# Altium PCB PCB.PcbDoc
Units mil, origin at the board's own origin, x right, y up, seen from the top; angles counter-clockwise.
Board outline 6000 x 4000 mil, 2 copper layers (Top Layer, Bottom Layer); 44 components, 59 nets, 169 pads, 0 vias.
Unrouted connection lines stored in the file: 100.
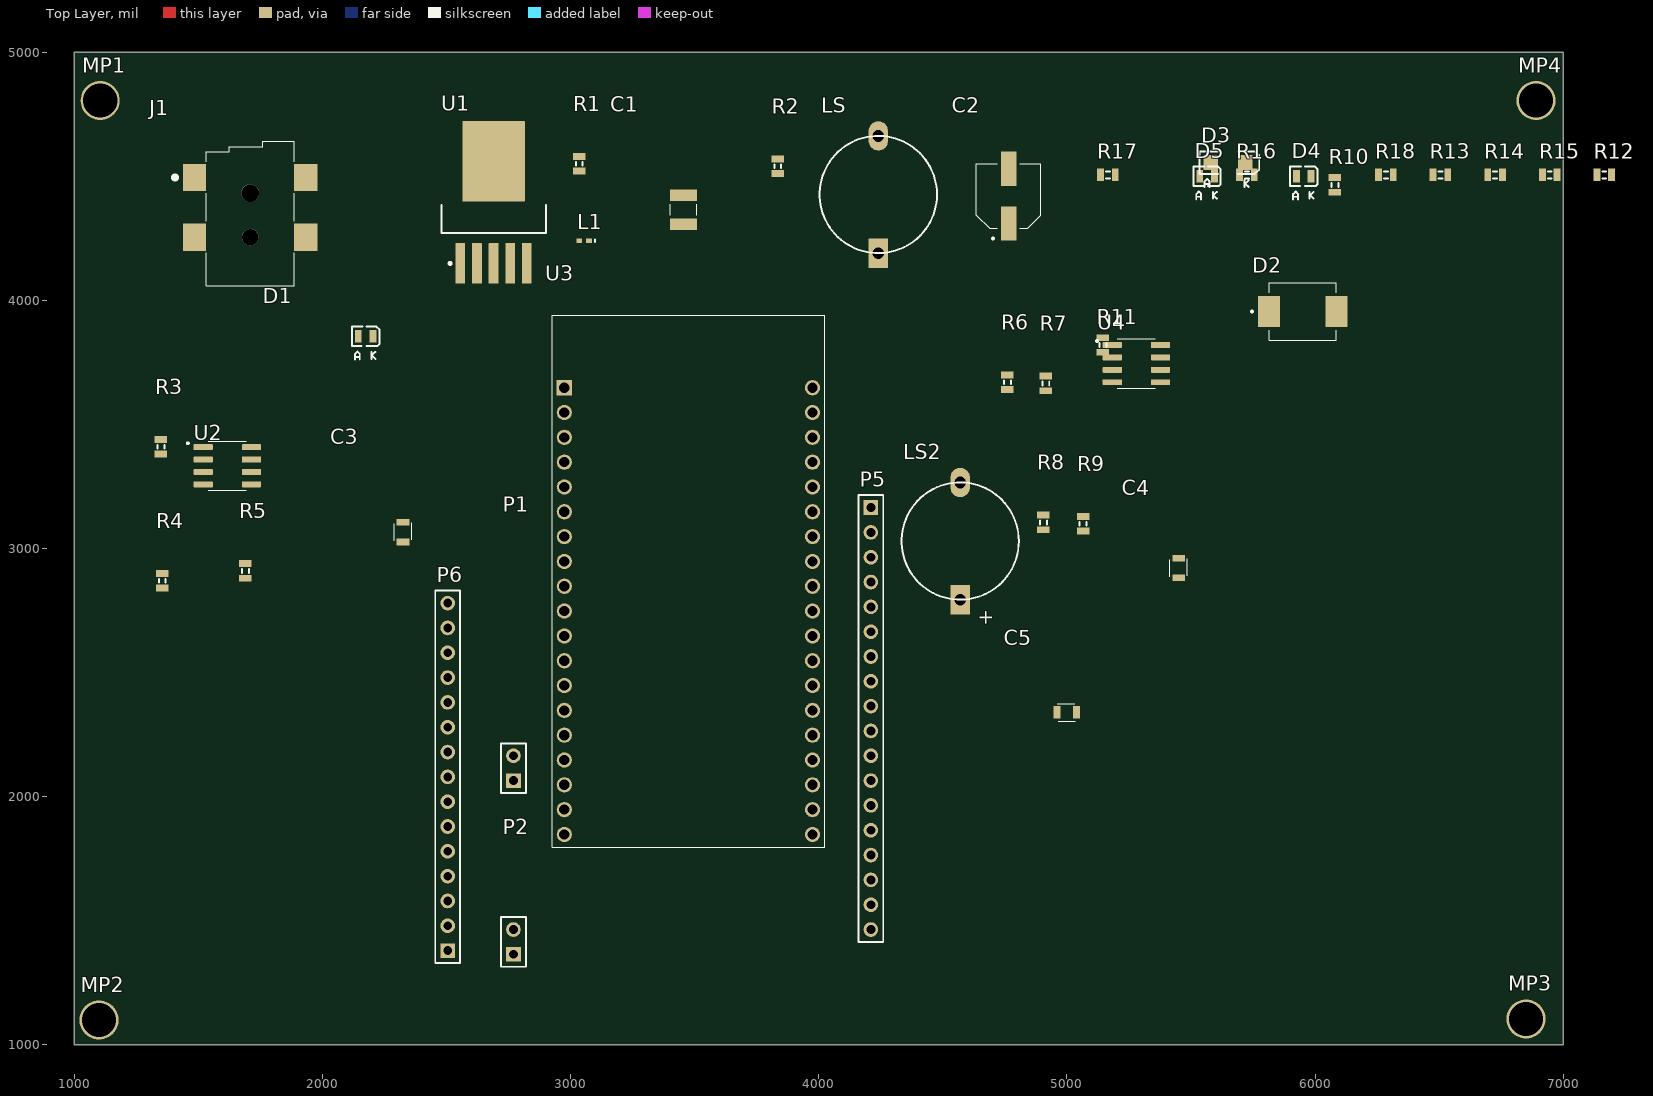
[diagram p0: Top Layer view]
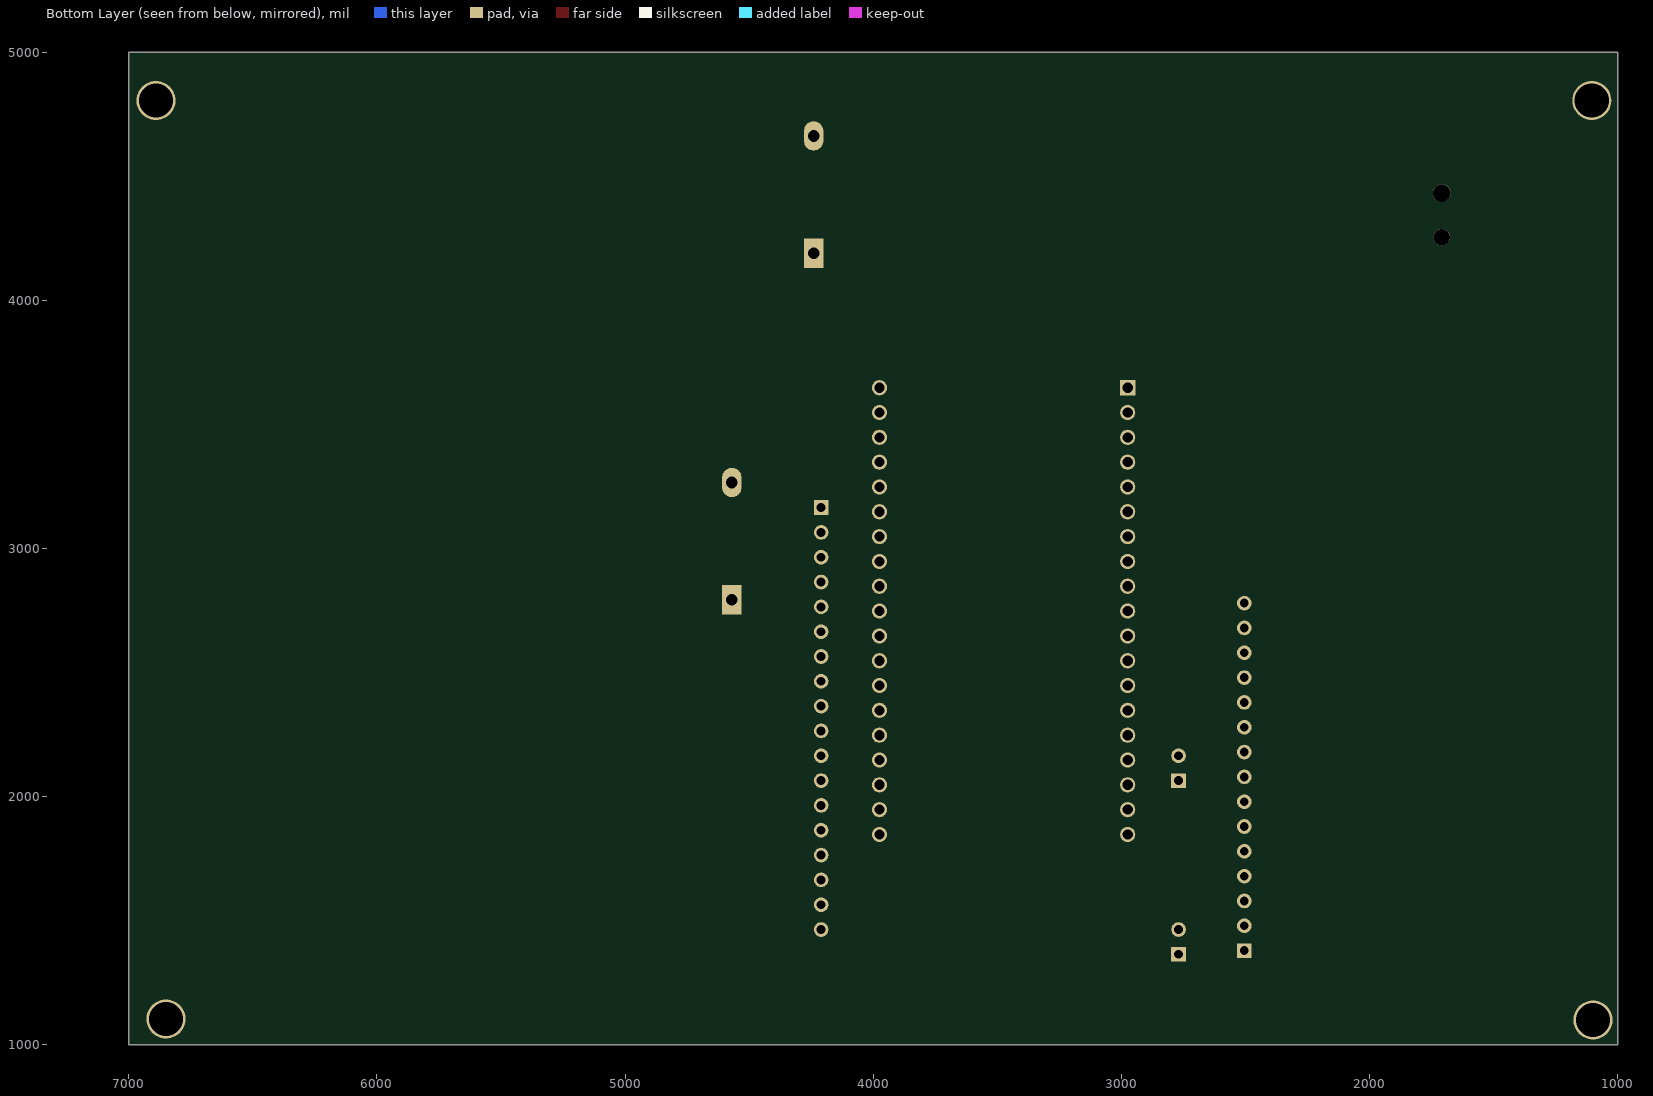
[diagram p1: Bottom Layer view, seen from below]

## Layer stack, top to bottom
Top Solder: solder mask 0.4, Solder Resist, Dk 3.5
Top Layer: signal copper 1.4
Dielectric 1: dielectric 12.6, FR-4, Dk 4.8
Bottom Layer: signal copper 1.4
Bottom Solder: solder mask 0.4, Solder Resist, Dk 3.5

## Board outline
1000,1000 7000,1000 7000,5000 1000,5000

## Design rules (kind name [scope] priority, off if disabled: settings)
Clearance [All] p1: gap=10 ignorepadtopadclearanceinfootprint=FALSE except(0: Arc-Hole Track-Hole SMDPad-Hole THPad-Hole Via-Hole Fill-Hole Poly-Hole Region-Hole Text-Hole)
PolygonConnect [All] p1: connectstyle=Relief reliefconductorwidth=10 reliefentries=4 polygonreliefangle="90 Angle" airgapwidth=10
RoutingVias [All] p1: holewidth=28 width=50 viastyle="Through Hole" minholewidth=28 minwidth=50 maxholewidth=28 maxwidth=50
SolderMaskExpansion [All] p1: expansion=4 istentingtop=FALSE
Width [All] p1: maxlimit=10 minlimit=10 preferedwidth=10
30 further rules are at their usual default settings.

## Classes and differential pairs
component class U_Etapa_Regulacion: C1 C2 C3 D1 D2 D3 J1 L1 P1 P2 R1 R2 R3 R4 U1
component class U_Etapa_Control_Ruido: C4 C5 D4 D5 LS LS2 MP1 MP2 MP3 MP4 P5 P6 R5 R6 R7 R8 R9 R10 R11 R12 R13 R14 R15 R16 R17 R18 U2 U3 U4

## Components (designator, comment, footprint, x,y, rotation, side; value= is the part's Value field where it differs from the comment)
C1 "100uF" CAPC3225X279N 3455,4365 r90 top
C2 "220uF" CAP_16SVPG220M 4765,4420 r90 top
C3 "0.1uF" CAPC4632X221N 2325,3025 r90 top
C4 "0.1uF" CAPC4632X221N 5450,2880 r90 top
C5 "10uF" CAPC4632X221N 5040,2340 r180 top
D1 "LED2" 3.2X1.6X1.1#1 2135,3855 r0 top
D2 "SS34" DIOM7959X265N 5950,3955 r0 top
D3 "LED2" 3.2X1.6X1.1#2 5648.9,4555 r0 top
D4 "LED2" 3.2X1.6X1.1#1 5915,4500 r0 top
D5 "LED2" 3.2X1.6X1.1#1 5525,4500 r0 top
J1 "*" CUI_PJ-002BH-SMT-TR 1485,4495 r90 top
L1 "Inductor" 0402-A 3055,4240 r180 top value=33uH
LS "POM-2244P-2-R" MICROFONO 4240,4426.22 r270 top
LS2 "AST-1732MR-R" Bocina 4570,3030 r270 top
MP1 "5205980-1" Tornillo 1105,4805 r0 top
MP2 "5205980-1" Tornillo 1100,1100 r0 top
MP3 "5205980-1" Tornillo 6850,1105 r0 top
MP4 "5205980-1" Tornillo 6890,4805 r0 top
P1 "Header 2" HDR1X2 2770,2065 r90 top
P2 "Header 2" HDR1X2 2770,1365 r90 top
P5 "Header 18" HDR1X18 4210,3165 r270 top
P6 "Header 15" HDR1X15 2505,1380 r90 top
R1 "Res3" J1-0603 3035,4550 r270 top value=330
R2 "Res3" J1-0603 3835,4540 r90 top value=330
R3 "Res3" J1-0603 1350,3410 r270 top value=1K
R4 "Res3" J1-0603 1355,2870 r270 top value=3.3K
R5 "Res3" J1-0603 1690,2910 r270 top value=10K
R6 "Res3" J1-0603 4760,3670 r90 top value=1K
R7 "Res3" J1-0603 4915,3665 r270 top value=10K
R8 "Res3" J1-0603 4905,3105 r90 top value=10K
R9 "Res3" J1-0603 5065,3100 r270 top value=470K
R10 "Res3" J1-0603 6080,4465 r90 top value=10k
R11 "Res3" J1-0603 5145,3820 r90 top value=10K
R12 "Res3" J1-0603 7165,4505 r0 top value=10k
R13 "Res3" J1-0603 6505,4505 r0 top value=10k
R14 "Res3" J1-0603 6725,4505 r0 top value=10k
R15 "Res3" J1-0603 6945,4505 r0 top value=10k
R16 "Res3" J1-0603 5725,4505 r0 top value=330
R17 "Res3" J1-0603 5165,4505 r0 top value=330
R18 "Res3" J1-0603 6285,4505 r0 top value=10k
U1 "LM2596S-ADJ/NOPB" KTT0005B_N 2690,4395 r90 top
U2 "LM358AMX/NOPB" SOIC127P599X175-8N 1617.29,3333.39 r0 top
U3 "*" MODULE_ESP32-DEVKITC-32D 3475,2870 r0 top
U4 "LM358AMX/NOPB" SOIC127P599X175-8N 5280,3745 r0 top

## Footprints (in the part's own frame and the unit in brackets; to place one, negate y for a bottom-side part, rotate by r counter-clockwise, add the part's x,y. Pads: shape width x height; smd on the part's side, far side on the other; paste and mask are expansions set on the pad)
3.2X1.6X1.1#1 [mm] "SMT LED; 2 Flat Leads"
  rect 0.7x1.28 smd: 1(0.25,0) 2(1.75,0)
  silkscreen extent -0.4,-2.4 2.4,1
3.2X1.6X1.1#2 [mm] "SMT LED; 2 Flat Leads"
  rect 1.5x1.5 smd: 1(-1.75,0) 2(1.75,0)
  silkscreen extent -2.9,-2.5 3.2,1.15
0402-A [mm] "Chip Inductor, Body 1.0x0.5mm, IPC High Density"
  rect 0.6x0.5 smd: 1(-0.5,0) 2(0.5,0)
  silkscreen extent -1.1,-0.15 -1.1,0.15, body extent -0.55,-0.3 0.55,0.3, height 0.55
Bocina [mm] "Polarized Capacitor (Radial); 2 Leads"
  rect 3x2 hole 1.2: 1(6,0)
  oval 3x2 hole 1.2: 2(-6,0)
  silkscreen extent -6,-6 6,6
CAP_16SVPG220M [mm]
  rect 3.5x1.6 smd: 1(-2.8,0) 2(2.8,0)
  silkscreen extent -4.45,-3.3 3.3,3.3
CAPC3225X279N [mm]
  rect 1.16x2.72 smd: 1(-1.475,0) 2(1.475,0)
  silkscreen extent -0.57,-1.35 0.57,1.35
CAPC4632X221N [mm]
  rect 0.7x1.3 smd: 1(0.05,0) 2(2.05,0)
  silkscreen extent 0.14,-0.9 2,0.9
CUI_PJ-002BH-SMT-TR [mm]
  rect 2.8x2.4 smd: 1A(0,0) 1B(-6.1,0) 2(-6.1,-11.4) 3(0,-11.4)
  round 1.7 hole 1.7 unplated: ""(-6.1,-5.7)
  round 1.8 hole 1.8 unplated: ""(-1.6,-5.7)
  silkscreen extent -11.1,-10.2 3.7,2.19
DIOM7959X265N [mm]
  rect 2.25x3.18 smd: 1(3.455,0) 2(-3.455,0)
  silkscreen extent -5.3,-2.95 3.44,2.95
HDR1X2 [mm] "Connector; Header; 2 Position"
  rect 1.5x1.5 hole 0.9: 1(0,0)
  round 1.5 hole 0.9: 2(2.54,0)
  silkscreen extent -1.27,-1.27 3.81,1.27
HDR1X15 [mm] "Connector; Header; 15 Position"
  rect 1.5x1.5 hole 0.9: 1(0,0)
  round 1.5 hole 0.9: 2(2.54,0) 3(5.08,0) 4(7.62,0) 5(10.16,0) 6(12.7,0) 7(15.24,0) 8(17.78,0) 9(20.32,0) 10(22.86,0) 11(25.4,0) 12(27.94,0) 13(30.48,0) 14(33.02,0) 15(35.56,0)
  silkscreen extent -1.27,-1.27 36.83,1.27
HDR1X18 [mm] "Connector; Header; 18 Position"
  rect 1.5x1.5 hole 0.9: 1(0,0)
  round 1.5 hole 0.9: 2(2.54,0) 3(5.08,0) 4(7.62,0) 5(10.16,0) 6(12.7,0) 7(15.24,0) 8(17.78,0) 9(20.32,0) 10(22.86,0) 11(25.4,0) 12(27.94,0) 13(30.48,0) 14(33.02,0) 15(35.56,0) 16(38.1,0) 17(40.64,0) 18(43.18,0)
  silkscreen extent -1.27,-1.27 44.45,1.27
J1-0603 [mm] "Chip Resistor, Body 1.6x0.8mm, IPC High Density"
  rect 0.7x1.28 smd: 1(-0.75,0) 2(0.75,0)
  silkscreen extent -0.2,-0.35 0.2,0.35, body extent -0.86,-0.53 0.84,0.43, height 0.9
KTT0005B_N [mm] "DPAK, 5-Leads, Body 10.65x9.65mm, Pitch 1.7mm, IPC Medium Density"
  rrect10% 4.15x1 smd: 1(-6.25,3.4) 2(-6.25,1.7) 3(-6.25,0) 4(-6.25,-1.7) 5(-6.25,-3.4)
  rrect2% 8.2x6.4 smd: 6(4.2,0)
  silkscreen extent -6.37,-5.35 -0.3,5.35, body extent -3.15,-5.32 6.5,5.33, height 4.83
MICROFONO [mm] "Polarized Capacitor (Radial); 2 Leads"
  rect 3x2 hole 1.2: 1(6,0)
  oval 3x2 hole 1.2: 2(-6,0)
  silkscreen extent -6,-6 6,6
MODULE_ESP32-DEVKITC-32D [mm]
  rect 1.56x1.56 hole 1.04: 1(-12.7,19.76)
  round 1.56 hole 1.04: 2(-12.7,17.22) 3(-12.7,14.68) 4(-12.7,12.14) 5(-12.7,9.6) 6(-12.7,7.06) 7(-12.7,4.52) 8(-12.7,1.98) 9(-12.7,-0.56) 10(-12.7,-3.1) 11(-12.7,-5.64) 12(-12.7,-8.18) 13(-12.7,-10.72) 14(-12.7,-13.26) 15(-12.7,-15.8) 16(-12.7,-18.34) 17(-12.7,-20.88) 18(-12.7,-23.42) 19(-12.7,-25.96) 20(12.7,19.76) 21(12.7,17.22) 22(12.7,14.68) 23(12.7,12.14) 24(12.7,9.6) 25(12.7,7.06) 26(12.7,4.52) 27(12.7,1.98) 28(12.7,-0.56) 29(12.7,-3.1) 30(12.7,-5.64) 31(12.7,-8.18) 32(12.7,-10.72) 33(12.7,-13.26) 34(12.7,-15.8) 35(12.7,-18.34) 36(12.7,-20.88) 37(12.7,-23.42) 38(12.7,-25.96)
  silkscreen extent -13.95,-27.25 13.95,27.15, body extent -13.97,-25.18 13.97,29.92, height 3.25
SOIC127P599X175-8N [mm]
  rrect25% 1.97x0.6 smd: 1(-2.47,1.905) 2(-2.47,0.635) 3(-2.47,-0.635) 4(-2.47,-1.905) 5(2.47,-1.905) 6(2.47,-0.635) 7(2.47,0.635) 8(2.47,1.905)
  silkscreen extent -4.14,-2.52 1.95,2.52, body extent -3,-2.45 3,2.45, height 1.75
Tornillo [mm]
  round 4 hole 3.5: 1(0,0)

## Part data
C1: library part LD106D107MAB2A, "Cap Ceramic 100uF 6.3V X5R 20% SMD 1210 85ÂÂŽ T/R", Package=None, Availability=Unavailable, MP=LD106D107MAB2A, Price=None
C2: library part 16SVPG220M, Package=None, Availability=Unavailable, MP=16SVPG220M, Price=None
C3 C4 C5: library part 1812CC104KAZ1A, "CAP,CERM,0.10UF,630V,X7R,1812; Dielectric Characteristic:X7R; Capacitance:100nF; Capacitance Tolerance:Â± 10%; Voltage Rating:630V; Temperature Coefficient:Â± 15%; Series:LT; Capacitor Case Style:1812; No. of Pins:2; Mounting Type:SMD; Operating Temperature Range:-55Â°C to +125Â°C; SVHC:No SVHC (18-Jun-2010)", Package=None, Availability=Unavailable, MP=1812CC104KAZ1A, Price=None
D1 D3 D4 D5: "Typical RED, GREEN, YELLOW, AMBER GaAs LED", LatestRevisionDate=17-Jul-2002, LatestRevisionNote="Re-released for DXP Platform.", PackageDescription="SM LED; 2 Flat Leads", PackageReference=3.2X1.6X1.1, PackageVersion=Feb-2002, Published=8-Jun-2000, Publisher="Altium Limited"
D2: "Diode Schottky 40V 3A Surface Mount SMC _DO-214AB_", Package="DO-214AB-214 ON Semiconductor", Availability=Unavailable, MF="ON Semiconductor", MP=SS34, Price=None, SnapEDA_Link=https://www.snapeda.com/parts/SS34/ON%20Semiconductor/view-part/4631325/?ref=snap
J1: library part PJ-002BH-SMT-TR, "2.5 x 6.5 mm, 5.0 A, Horizontal, Surface Mount _SMT_, Dc Power Jack Connector", Package=None, Availability=Unavailable, CUI_purchase_URL=https://www.cuidevices.com/product/interconnect/connectors/dc-power-connectors/jacks/pj-002bh-smt-tr?utm_source=snapeda.com&utm_medium=referral&utm_campaign=snapedaBOM, MF="CUI Devices", MP=PJ-002BH-SMT-TR, Price=None, SnapEDA_Link=https://www.snapeda.com/parts/PJ-002BH-SMT-TR/CUI%20Devices/view-part/378040/?ref=snap
LS: "ELECTRET CONDENSER MICROPHONE 6MM DIA", Package=None, Availability="In Stock", Check_prices=https://www.snapeda.com/parts/POM-2244P-2-R/PUI+Audio%252C+Inc./view-part/?ref=eda, MF="PUI Audio,", MP=POM-2244P-2-R, Price=None, SnapEDA_Link=https://www.snapeda.com/parts/POM-2244P-2-R/PUI+Audio%252C+Inc./view-part/?ref=snap
LS2: "æ‰¬å£°å™¨.2W 32æ¬§å§†90DBA 1700HZ", Package=None, Availability="In Stock", Check_prices=https://www.snapeda.com/parts/AST-1732MR-R/PUI+Audio/view-part/?ref=eda, MF="PUI Audio", MP=AST-1732MR-R, Price=None, Purchase-URL=https://pricing.snapeda.com/search/part/AST-1732MR-R/?ref=eda, SnapEDA_Link=https://www.snapeda.com/parts/AST-1732MR-R/PUI+Audio/view-part/?ref=snap
MP1 MP2 MP3 MP4: library part CMP-03367-000025-1, "CONN D-SUB SCREW RETAINER MALE", Color=Yellow, Package Quantity=1, Depth=6.35mm, ELV=Compliant, Gender=Male, Lead Free="Lead Free", Length=7.1mm, Material=Steel, Mount=Screw, Packaging=Bag, Radiation Hardening=No, REACH SVHC="No SVHC", RoHS Compliant=Yes, Series=AMPLIMITE
P1 P2: "Header, 2-Pin", LatestRevisionDate=17-Jul-2002, LatestRevisionNote="Re-released for DXP Platform.", Publisher="Altium Limited"
P5: "Header, 18-Pin", LatestRevisionDate=17-Jul-2002, LatestRevisionNote="Re-released for DXP Platform.", Publisher="Altium Limited"
P6: "Header, 15-Pin", LatestRevisionDate=17-Jul-2002, LatestRevisionNote="Re-released for DXP Platform.", Publisher="Altium Limited"
R1 R2 R3 R4 R5 R6 R7 R8 R9 R10 R11 R12 R13 R14 R15 R16 R17 R18: "Resistor", LatestRevisionDate=29-May-2009, LatestRevisionNote="IPC-7351 Footprint Added.", PackageDescription="Chip Resistor", PackageReference=J1-0603, Published=8-Jun-2000, Publisher="Altium Limited"
U1: library part CMP-0069-00271-3, "SIMPLE SWITCHER® Power Converter 150 KHz 3A Step-Down Voltage Regulator, 5-pin TO-263, Pb-Free", Manufacturer="Texas Instruments", PackageTopMarking="NSUZXYTTE#*LM2596S*-ADJ P+", PowerWise=N, Code_JEDEC=MO-169-AB, ComponentLink1Description="Datasheet URL", ComponentLink1URL=http://www.ti.com/general/docs/lit/getliterature.tsp?genericPartNumber=LM2596&fileType=pdf, CompType=Switcher, PackageDescription="TO-263, Molded, .400 x .390 x .180in, 5 Lead, .067in Pitch, Surface Mount", PackageReference=KTT0005B, PinCount=5, RoHS=Y
U2 U4: "2-Channel, 1MHz, industry standard, 32V op amp 8-SOIC 0 to 70", Package="SOIC-8 Texas Instruments", Availability=Good, Check_prices=https://www.snapeda.com/parts/LM358AMX/NOPB/Texas%20Instruments/view-part/18081/?ref=eda, MF="Texas Instruments", MP=LM358AMX/NOPB, Price=None, Purchase-URL=https://pricing.snapeda.com/search/part/LM358AMX/NOPB/?ref=eda, SnapEDA_Link=https://www.snapeda.com/parts/LM358AMX/NOPB/Texas%20Instruments/view-part/18081/?ref=snap
U3: library part ESP32-DEVKITC-32D, "EVAL BOARD FOR ESP-WROOM-32", Package=None, Availability=Warning, Check_prices=https://www.snapeda.com/parts/ESP32-DEVKITC-32D/Espressif%20Systems/view-part/2777395/?ref=eda, MF="Espressif Systems", MP=ESP32-DEVKITC-32D, Price=None, Purchase-URL=https://pricing.snapeda.com/search/part/ESP32-DEVKITC-32D/?ref=eda, SnapEDA_Link=https://www.snapeda.com/parts/ESP32-DEVKITC-32D/Espressif%20Systems/view-part/2777395/?ref=snap
L1: Code_IEC=1005, Code_JEITA=0402, LatestRevisionDate=29-May-2009, LatestRevisionNote="IPC-7351 Footprint Added.", PackageDescription="Chip Inductor", PackageReference=0402-A, Published=8-Jun-2000, Publisher="Altium Limited"

## Nets (pads, with @x,y where several pads share a name; then routed paths per layer and width w, separated by ;. In a path a pad name is that pad's centre, name@x,y a point inside that pad or via, vN(x,y) a via of type N, cw(c..) or ccw(c..) an arc to the next point about the centre after c; other vN are vias at no path point)
GND: C1.1 C2.2 C3.1 D1.2 D2.1 D3.2 D4.2 D5.2 J1.2 J1.3 LS2.2 LS.1 R8.2 R13.2 U1.3 U1.5 U1.6 U3.14
Led_r: R17.2 U3.6
Led_v: R16.2 U3.5
NetC1_2: C1.2 P1.2 R1.1 R3.1 U1.1
NetC2_1: C2.1 L1.2 P2.1 R4.2
NetC4_1: C4.1 R6.1
NetC4_2: C4.2 LS.2 R5.2
NetC5_1: C5.1 U4.1
NetC5_2: C5.2 LS2.1
NetD1_1: D1.1 R1.2
NetD2_2: D2.2 L1.1 U1.2
NetD3_1: D3.1 R2.1
NetD4_1: D4.1 R16.1
NetD5_1: D5.1 R17.1
NetJ1_1A: J1.1A J1.1B P1.1
NetP5_1: P5.1 U3.20
NetP5_2: P5.2 U3.21
NetP5_3: P5.3 U3.22
NetP5_4: P5.4 U3.23
NetP5_5: P5.5 U3.24
NetP5_6: P5.6 U3.25
NetP5_7: P5.7 U3.26
NetP5_8: P5.8 U3.27
NetP5_9: P5.9 U3.28
NetP5_10: P5.10 U3.29
NetP5_11: P5.11 U3.30
NetP5_12: P5.12 U3.31
NetP5_13: P5.13 U3.32
NetP5_14: P5.14 U3.33
NetP5_15: P5.15 U3.34
NetP5_16: P5.16 U3.35
NetP5_17: P5.17 U3.36
NetP5_18: P5.18 U3.37
NetP6_1: P6.1 U3.19
NetP6_2: P6.2 U3.18
NetP6_3: P6.3 U3.17
NetP6_4: P6.4 U3.16
NetP6_5: P6.5 U3.15
NetP6_6: P6.6 U3.13
NetP6_7: P6.7 U3.12
NetP6_8: P6.8 U3.11
NetP6_9: P6.9 U3.10
NetP6_10: P6.10 U3.9
NetP6_11: P6.11 U3.8
NetP6_12: P6.12 U3.7
NetP6_13: P6.13 U3.4
NetP6_14: P6.14 U3.3
NetP6_15: P6.15 U3.2
NetR3_2: R3.2 R4.1 U1.4
NetR6_2: R6.2 R9.2 U2.2
NetR7_2: R7.2 R8.1 U2.3
NetR9_1: R9.1 R10.1 U2.1
NetR11_1: R11.1 U4.2
NetR11_2: R11.2 R18.1 U2.7
NetR12_1: R12.1 R13.1 U2.5
NetR14_1: R14.1 R15.2 U4.3
NetR14_2: R14.2 U2.4 U4.4 U4.5 U4.6
out1: R10.2 R18.2 U2.6
Vin: P2.2 R2.2 R5.1 R7.1 R12.2 R15.1 U2.8 U3.1 U4.8
pads on no net: C3.2 J1. MP1.1 MP2.1 MP3.1 MP4.1 U3.38 U4.7

## Text inside footprints (layer, text, board x,y; h text height)
LS2: Top Overlay "+" at 4648.74,2754.41 h59.06 r270